# Altium PCB PS__INN3947CQ_V2.PcbDoc
Units mm, origin at the board's own origin, x right, y up, seen from the top; angles counter-clockwise.
Board outline 66 x 77 mm, 6 copper layers (Top Layer, Mid-Layer 1, Mid-Layer 2, Mid-Layer 3, Mid-Layer 4, Bottom Layer), stack 1.551 mm thick; 61 components, 32 nets, 167 pads, 854 vias.
Unrouted connection lines stored in the file: 65.
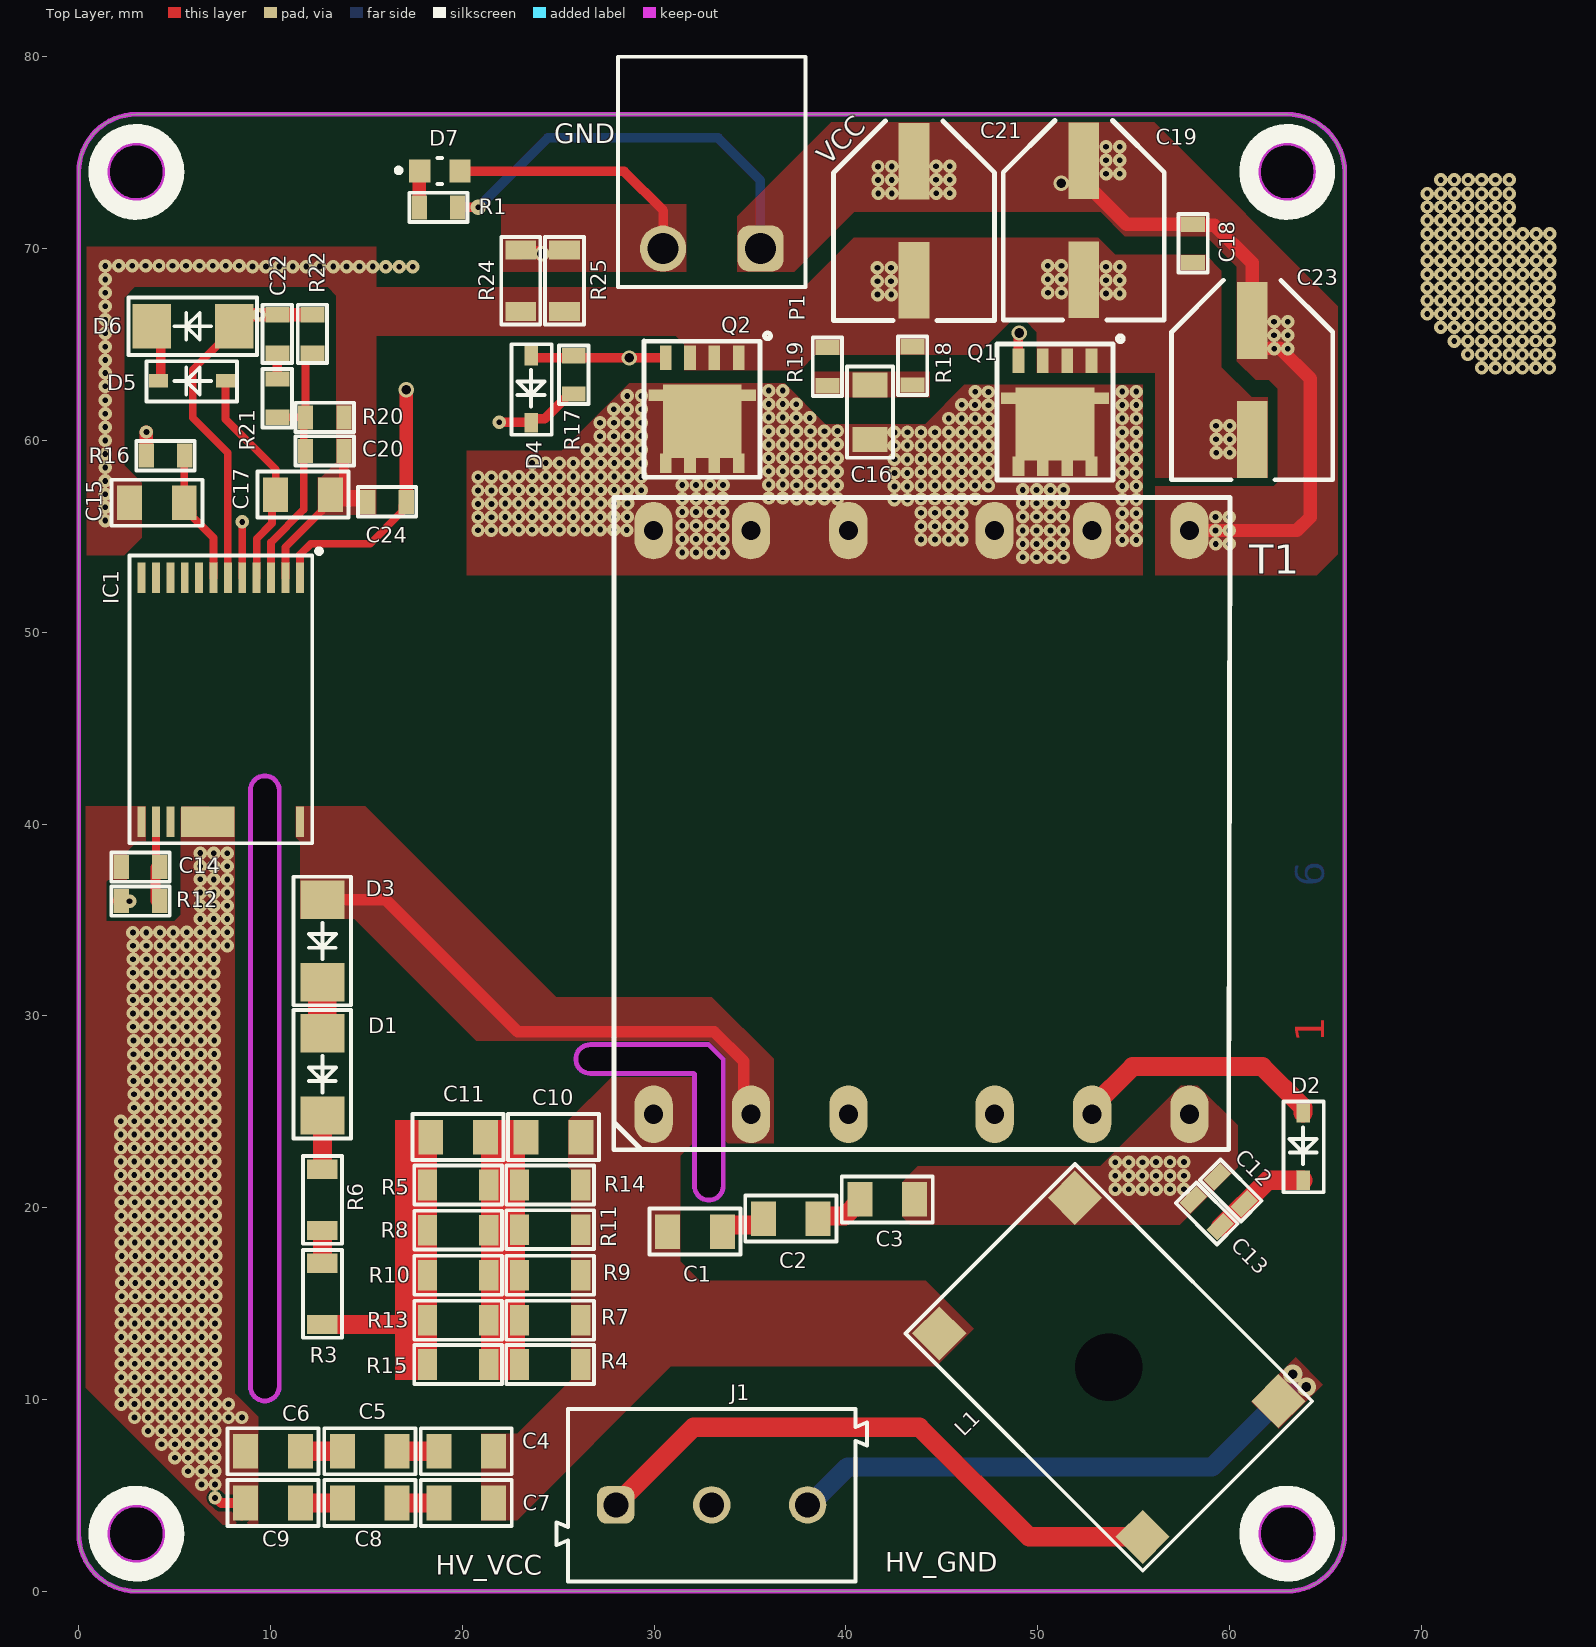
[diagram p0: Top Layer view]
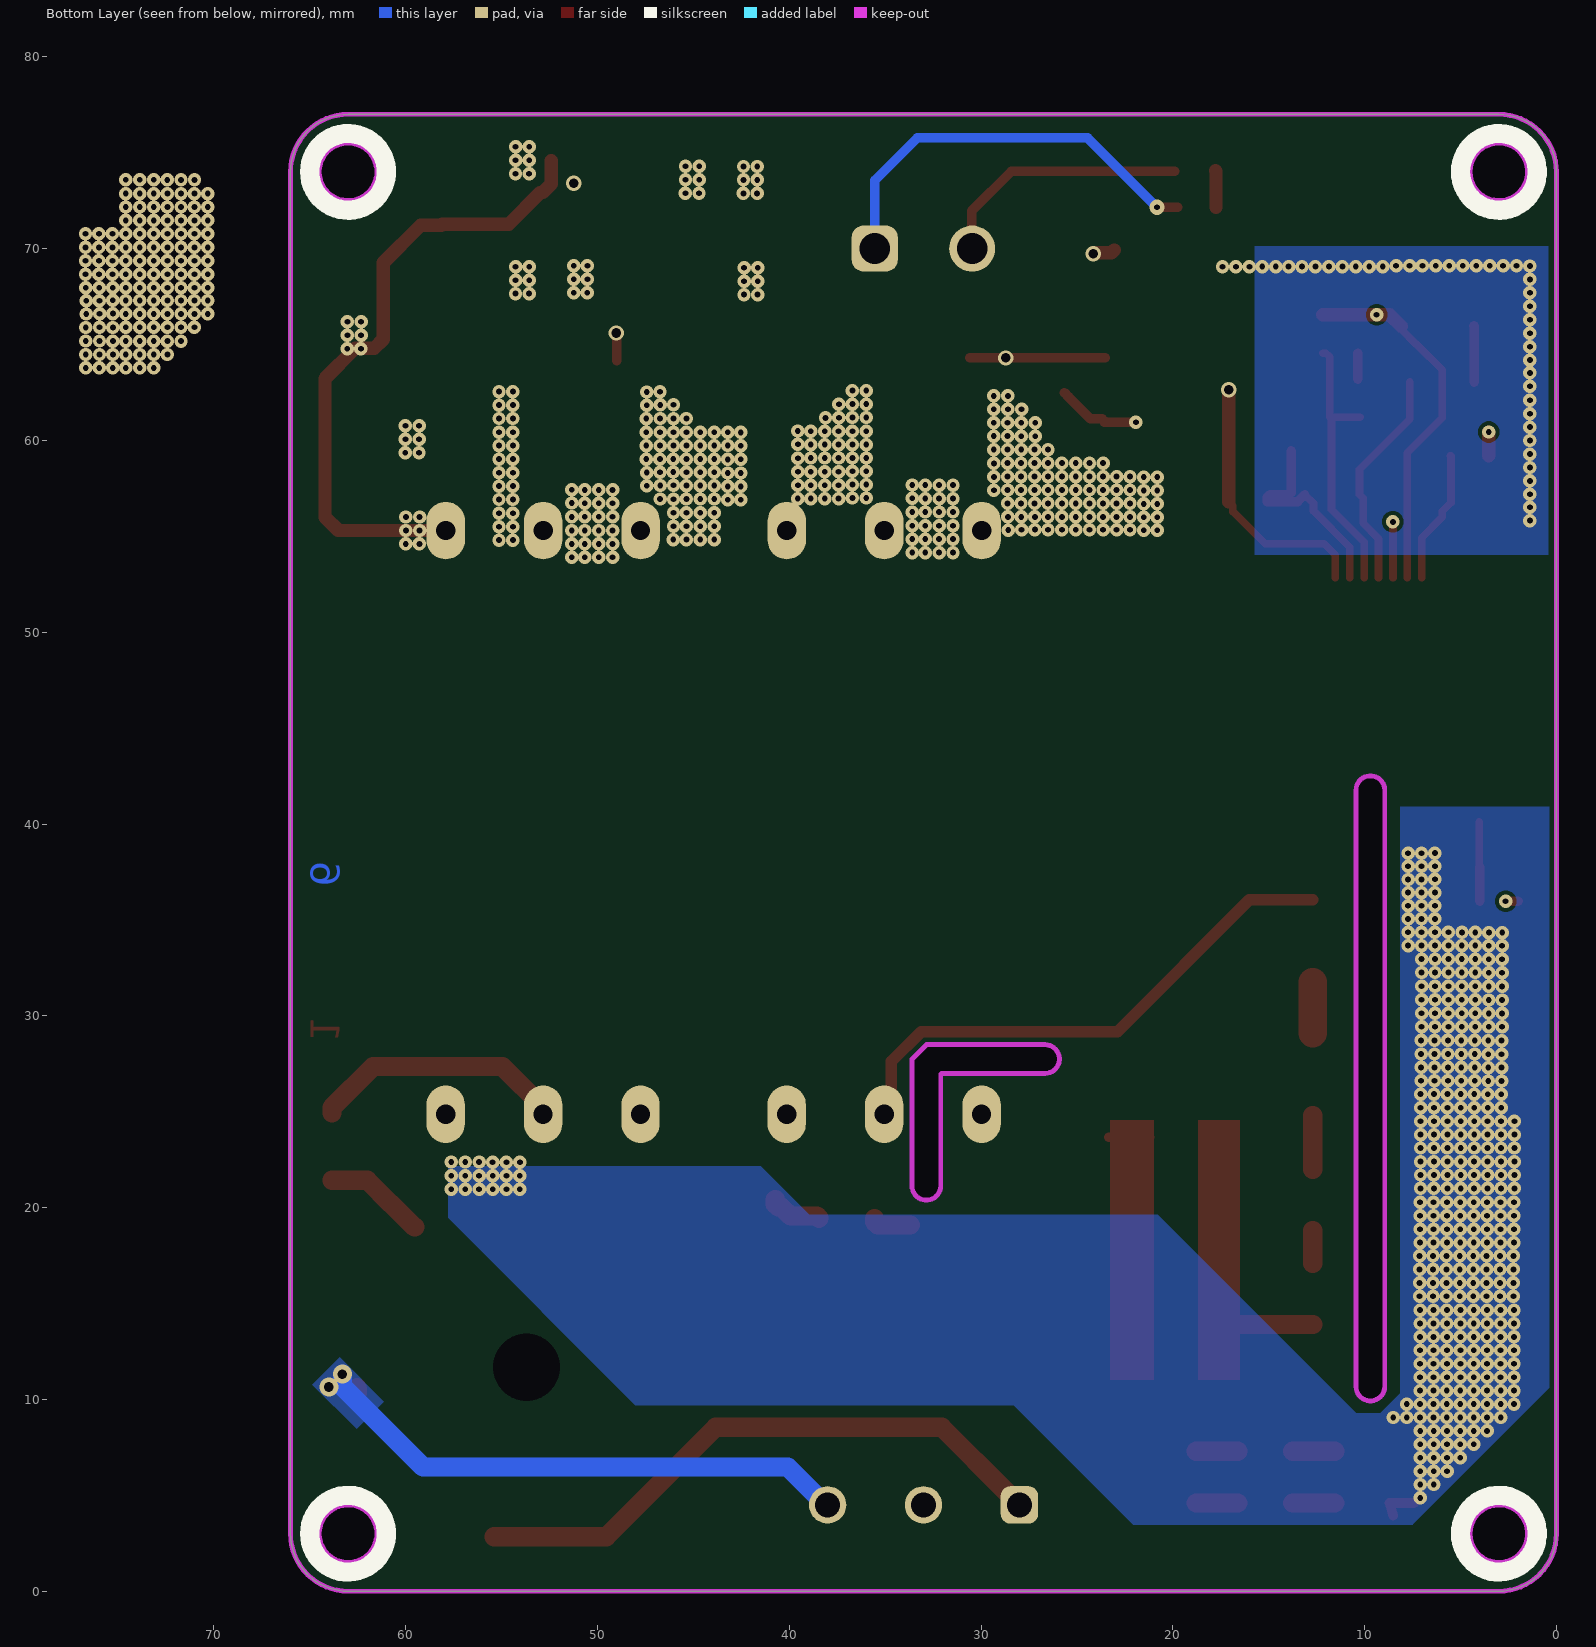
[diagram p1: Bottom Layer view, seen from below]
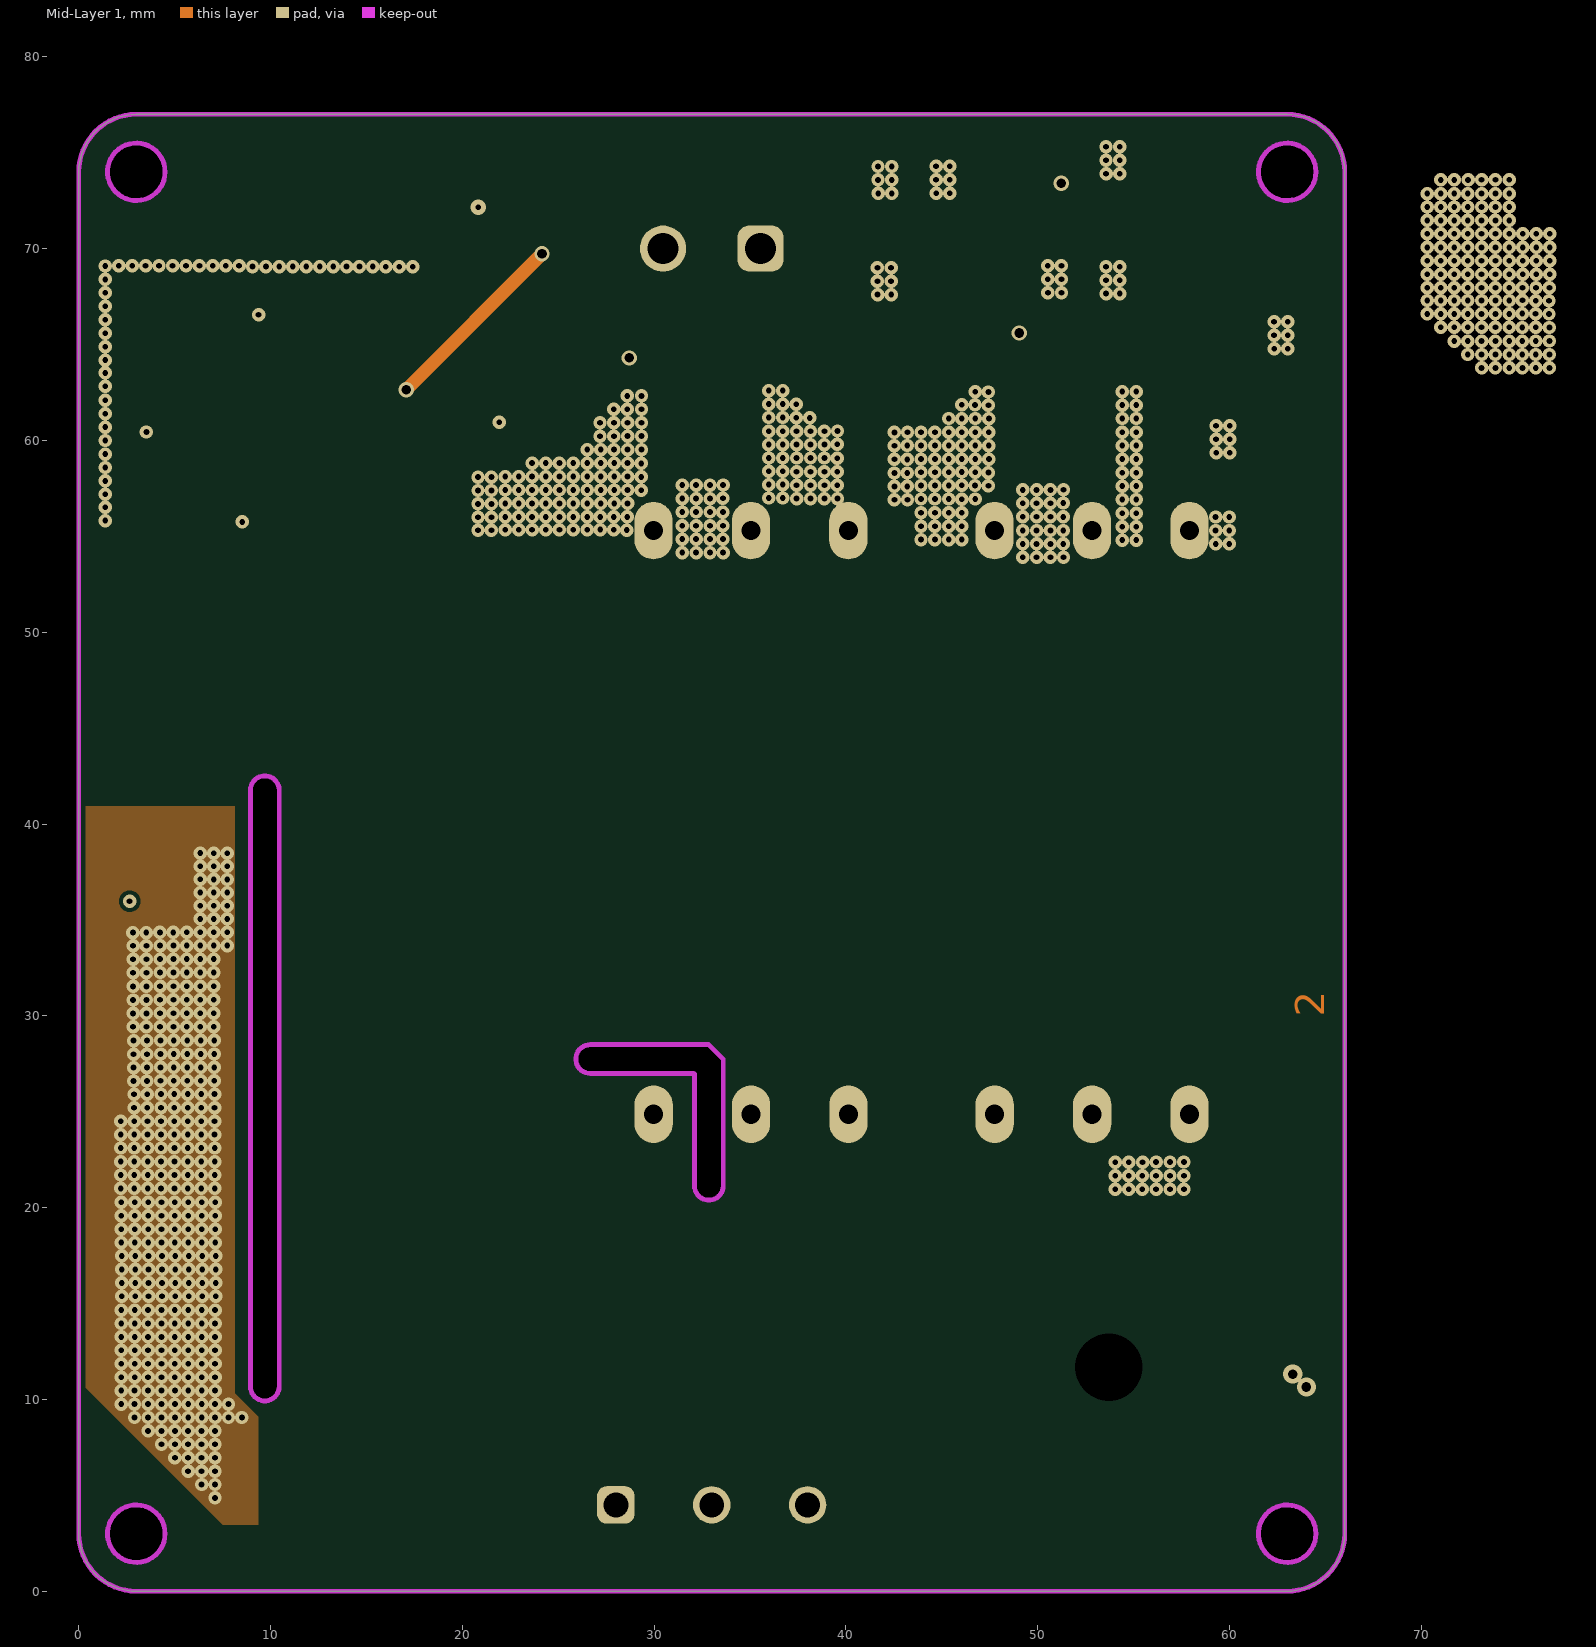
[diagram p2: Mid-Layer 1]
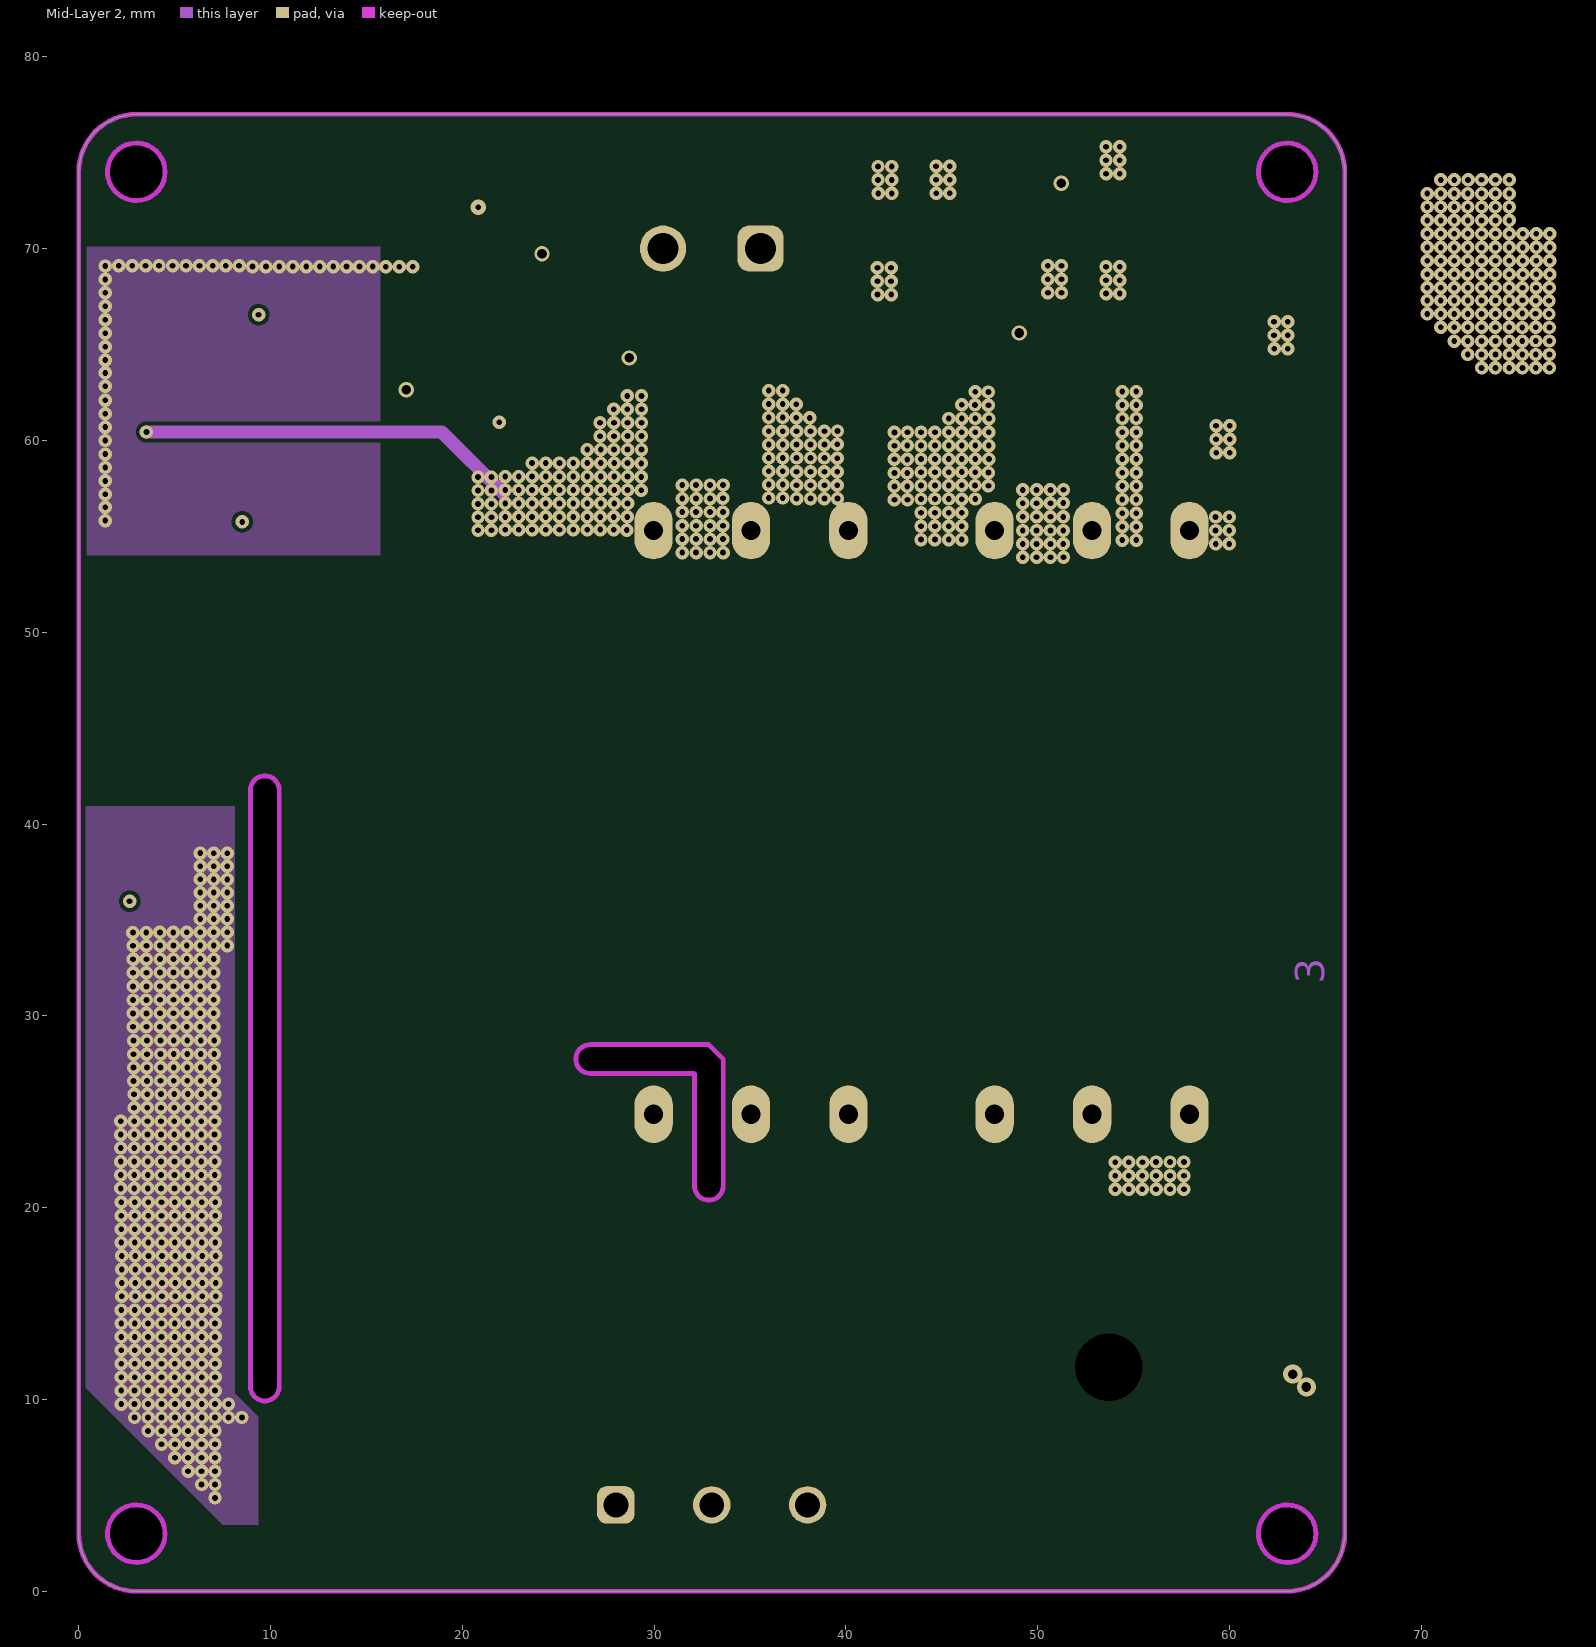
[diagram p3: Mid-Layer 2]
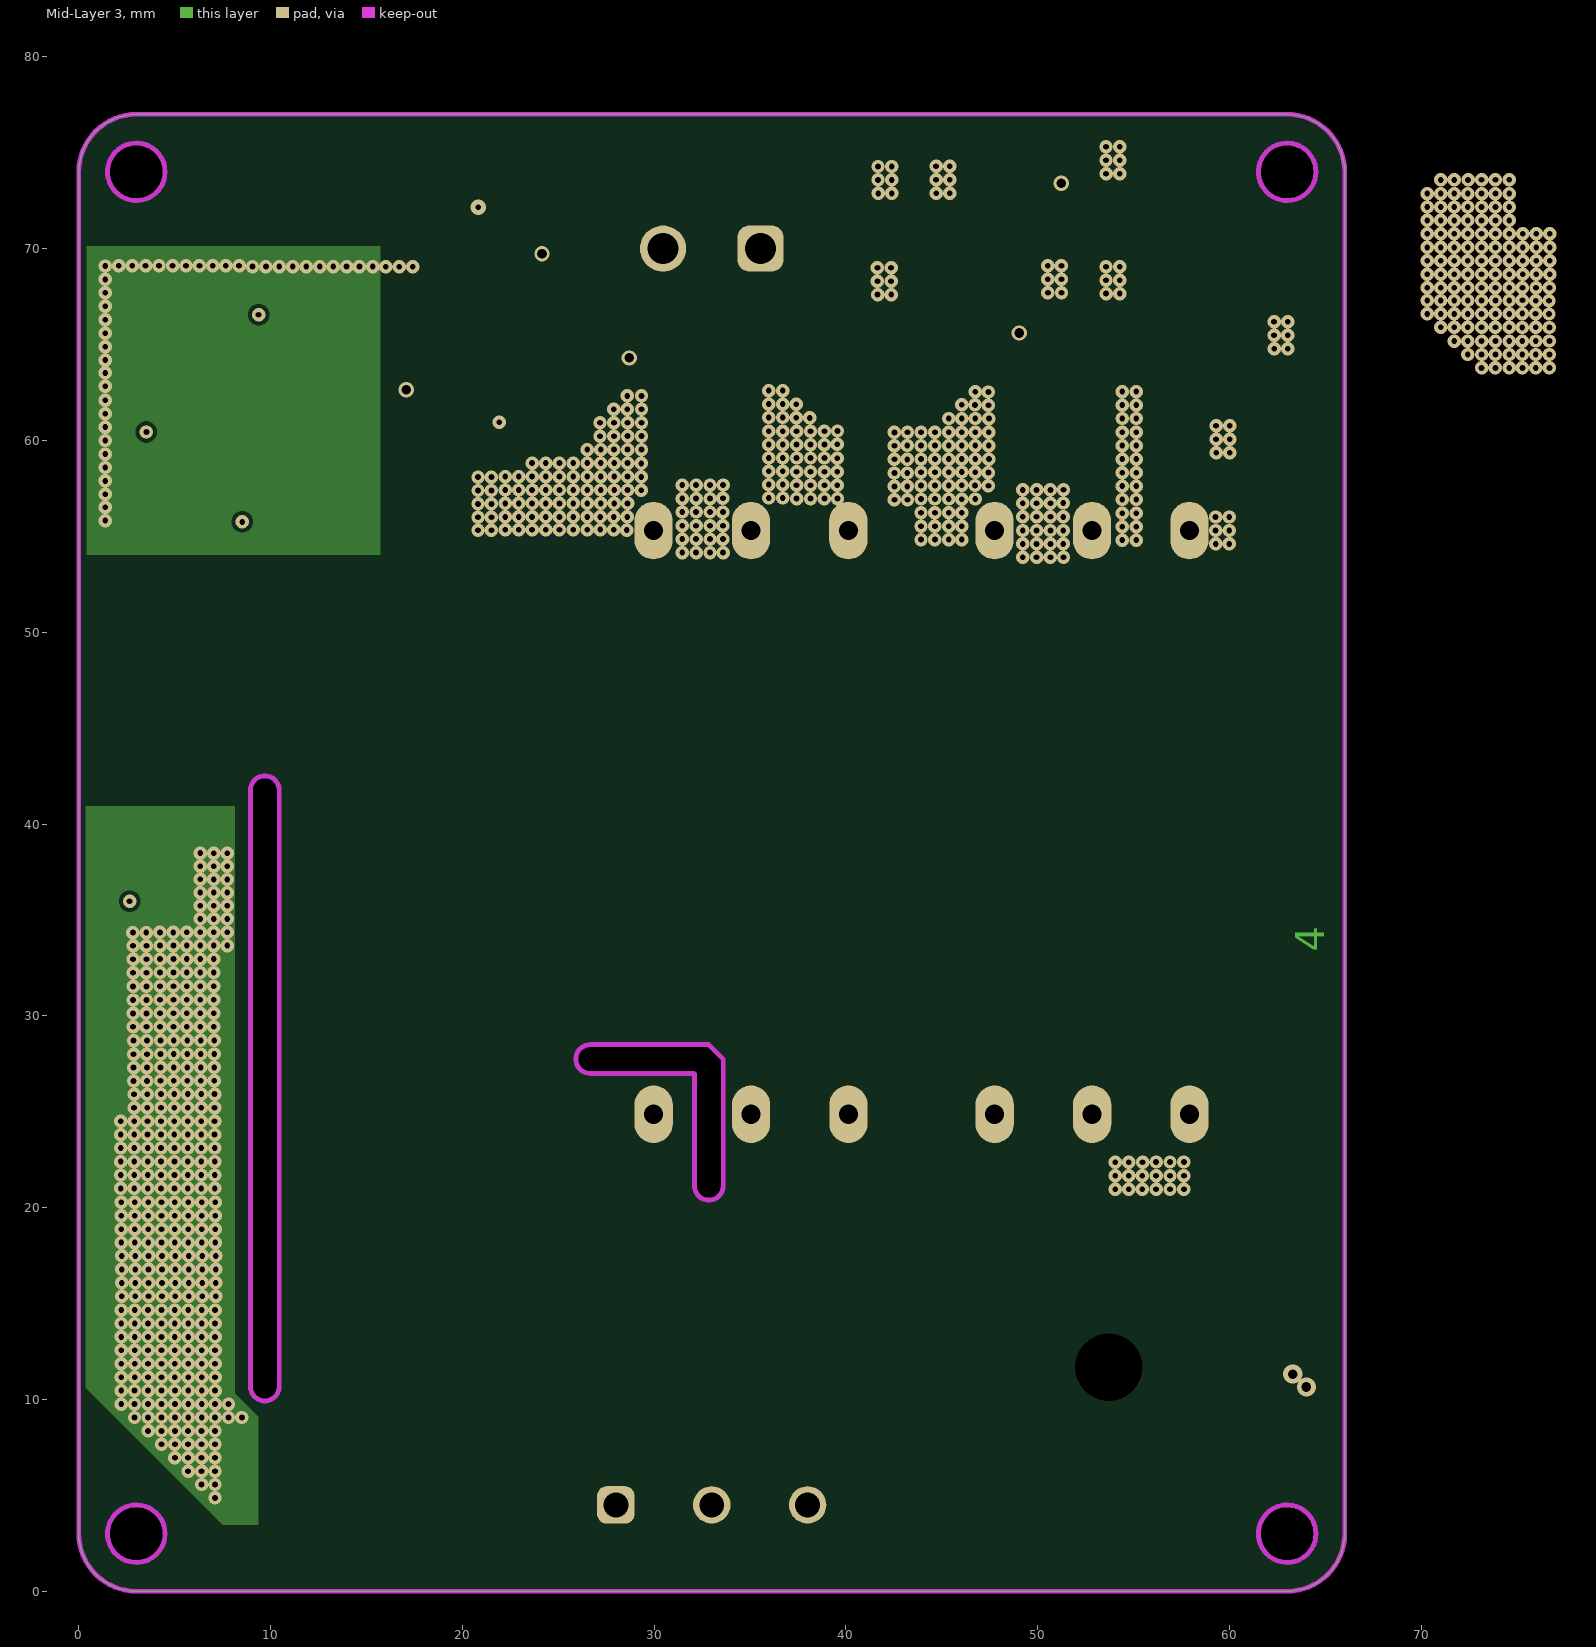
[diagram p4: Mid-Layer 3]
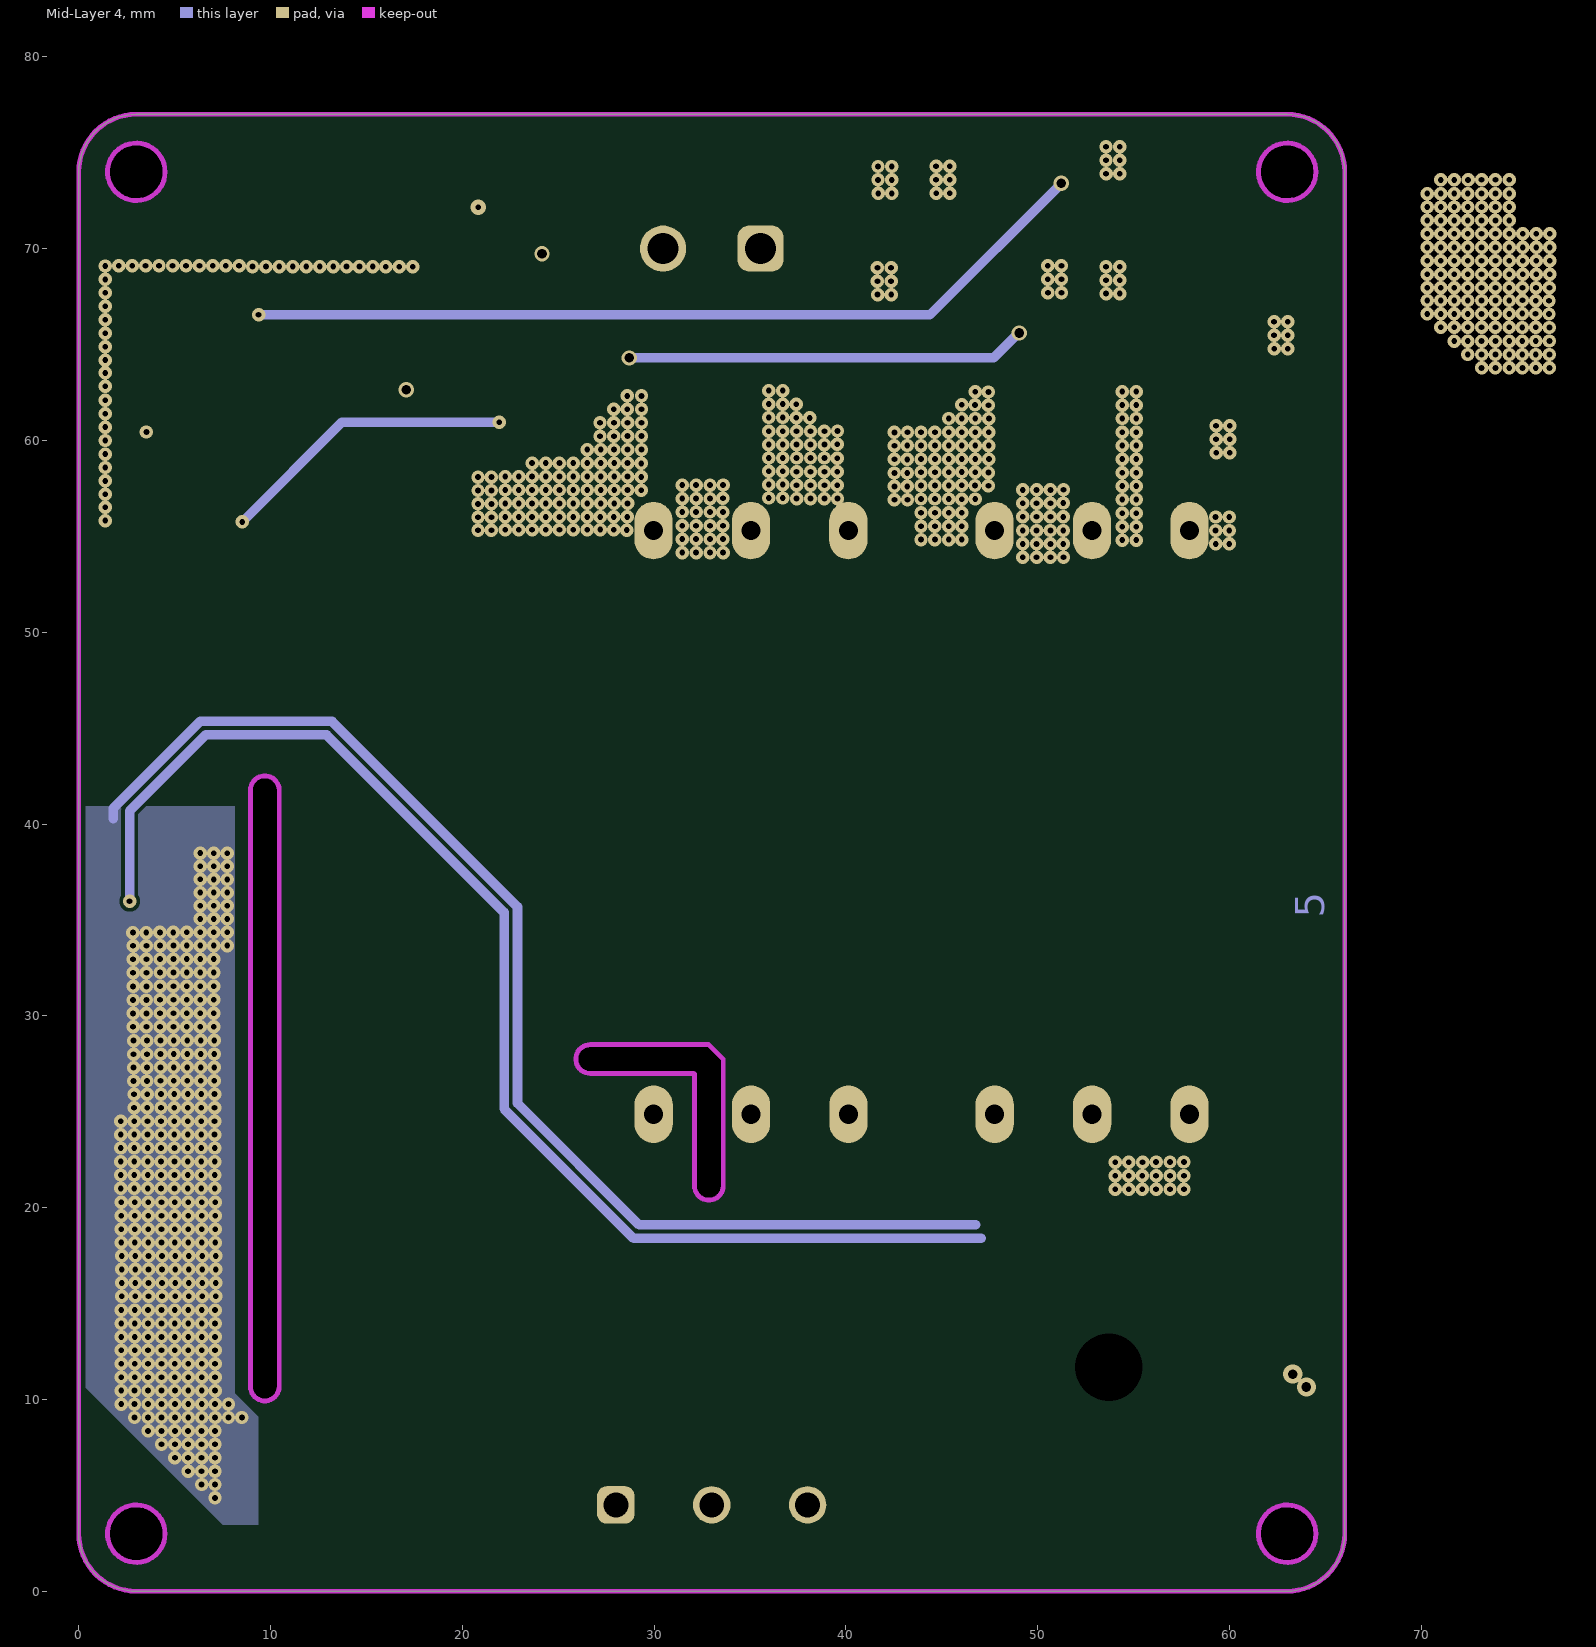
[diagram p5: Mid-Layer 4]
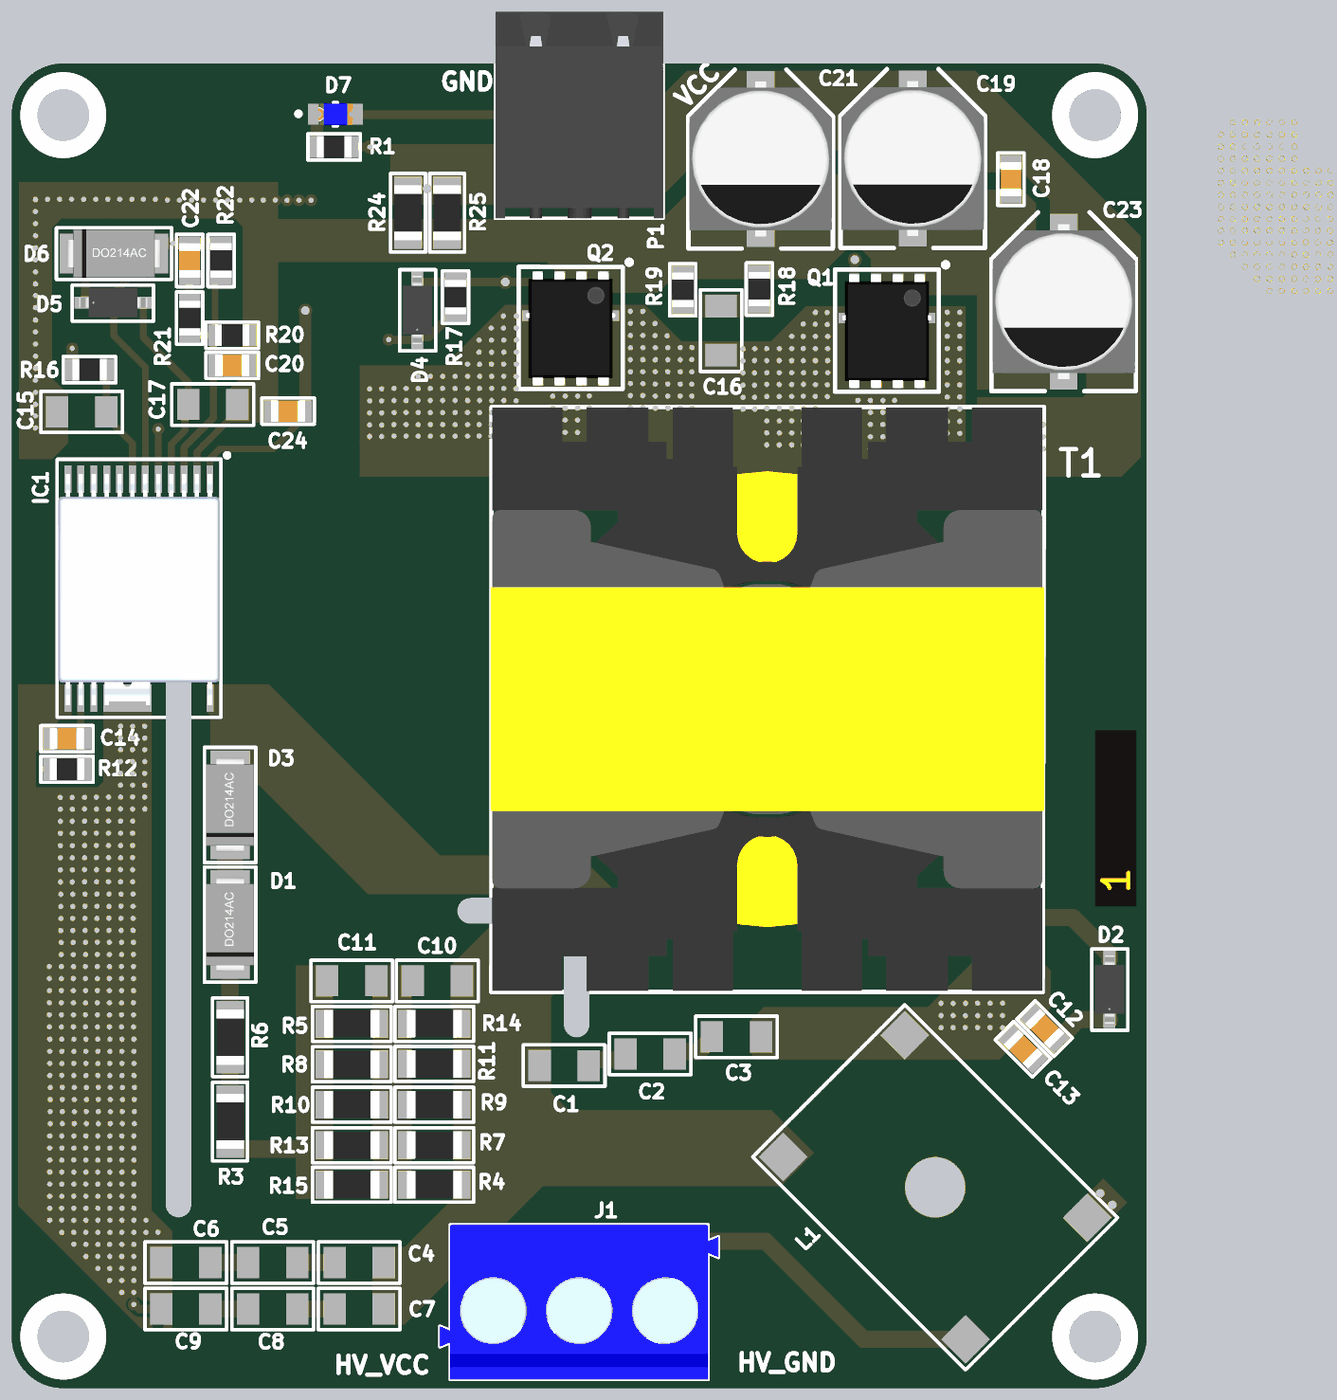
[diagram p6: 3D render of the assembled board from above, using the file's embedded part models]

## Layer stack, top to bottom
Top Solder: solder mask 0.0254, SM-001, Dk 4
Top Layer: signal copper 0.035
Dielectric 1: prepreg 0.0711, PP-006, Dk 4.1
Dielectric 2: prepreg 0.0711, PP-006, Dk 4.1
Mid-Layer 1: signal copper 0.035
Dielectric 3: core 0.4572, Core-035, Dk 4.7
Mid-Layer 2: signal copper 0.035
Dielectric 4: prepreg 0.0711, PP-006, Dk 4.1
Dielectric 5: prepreg 0.0711, PP-006, Dk 4.1
Mid-Layer 3: signal copper 0.035
Dielectric 6: core 0.4572, Core-035, Dk 4.7
Mid-Layer 4: signal copper 0.035
Dielectric 7: prepreg 0.0711, PP-006, Dk 4.1
Dielectric 8: prepreg 0.0711, PP-006, Dk 4.1
Bottom Layer: signal copper 0.035
Bottom Solder: solder mask 0.0254, SM-001, Dk 4

## Board outline
0,3 ccw(c3,3) 3,0 63,0 ccw(c63,3) 66,3 66,74 ccw(c63,74) 63,77 3,77 ccw(c3,74) 0,74
cut-out: 26.664,26.996 cw(c26.664,27.746) 26.664,28.496 26.664,28.5 32.84,28.5 33.6,27.74 33.6,21.139 cw(c32.85,21.139) 32.1,21.139 32.1,26.957 32.057,27
cut-out: 61.5,74 ccw(c63,74) 63,72.5 ccw(c63,74) 64.5,74 ccw(c63,74) 63,75.5 ccw(c63,74)
cut-out: 1.5,74 ccw(c3,74) 3,72.5 ccw(c3,74) 4.5,74 ccw(c3,74) 3,75.5 ccw(c3,74)
cut-out: 1.5,3 ccw(c3,3) 3,1.5 ccw(c3,3) 4.5,3 ccw(c3,3) 3,4.5 ccw(c3,3)
cut-out: 61.5,3 ccw(c63,3) 63,1.5 ccw(c63,3) 64.5,3 ccw(c63,3) 63,4.5 ccw(c63,3)
cut-out: 8.95,10.675 8.95,41.763 cw(c9.7,41.763) 10.45,41.763 10.45,10.675 cw(c9.7,10.675)

## Design rules (kind name [scope] priority, off if disabled: settings)
Clearance Clearance_1 [All vs InNet('GND_1')] p1: gap=0.2 ignorepadtopadclearanceinfootprint=FALSE
Clearance [All vs InNet('GND')] p2: gap=0.2 ignorepadtopadclearanceinfootprint=FALSE except(0.4: Fill-Fill Fill-Poly Fill-Region Fill-Text Fill-Hole Poly-Poly Poly-Region Poly-Text Poly-Hole Region-Region Region-Text Region-Hole)
ComponentClearance [All] p1: gap=-3 collisioncheckmode=3 verticalgap=0.254 showdistances=FALSE
Height [All] p1: minheight=0 maxheight=50 prefheight=33
HoleSize [All] p1: absolutevalues=TRUE maxlimit=6 minlimit=0.01 maxpercent=80.000 minpercent=20.000
HoleToHoleClearance [All] p1: gap=0.1 allowstackedmicrovias=TRUE
MinimumSolderMaskSliver [All] p1: minsoldermaskwidth=0.1
PlaneClearance [All] p1: clearance=0.7
PlaneConnect [All] p1: planeconnectstyle=Direct reliefexpansion=0.5 reliefentries=4 reliefconductorwidth=0.5 reliefairgap=0.15
PolygonConnect VQFN20 [HasFootprint('VQFN20')] p1: connectstyle=Direct reliefconductorwidth=0.254 reliefentries=4 polygonreliefangle="90 Angle" airgapwidth=0.254
PolygonConnect [All] p2: connectstyle=Direct reliefconductorwidth=0.3 reliefentries=4 polygonreliefangle="90 Angle" airgapwidth=0.15
RoutingVias [All] p1: holewidth=0.1 width=0.1 viastyle="Through Hole" minholewidth=0 minwidth=0.3 maxholewidth=2 maxwidth=4
ShortCircuit [All] p1: allowed=TRUE
SilkToSolderMaskClearance [IsPad] p1: minsilkscreentomaskgap=0.1 clearancetoexposedcopper=TRUE
SolderMaskExpansion SolderMaskExpansion_Via [IsVia] p1: expansion=0.102 istentingtop=TRUE
SolderMaskExpansion [All] p2: expansion=0.01 istentingtop=FALSE
UnRoutedNet [All] p1: checkbadconnections=TRUE
Width [All] p1: maxlimit=5 minlimit=0.2 preferedwidth=0.3
20 further rules are at their usual default settings.

## Components (designator, comment, footprint, x,y, rotation, side; value= is the part's Value field where it differs from the comment)
C1 "68nF 500V" CAP-1206 32.125,18.75 r0 top
C2 "68nF 500V" CAP-1206 37.125,19.425 r0 top
C3 "68nF 500V" CAP-1206 42.15,20.425 r0 top locked
C4 "68nF 500V" CAP-1206 20.202,7.3 r180 top
C5 "68nF 500V" CAP-1206 15.177,7.3 r180 top
C6 "68nF 500V" CAP-1206 10.127,7.3 r180 top
C7 "68nF 500V" CAP-1206 20.202,4.6 r180 top
C8 "68nF 500V" CAP-1206 15.177,4.6 r180 top
C9 "68nF 500V" CAP-1206 10.127,4.6 r180 top
C10 "6.8nF 630V" CAP-1206 24.75,23.675 r180 top
C11 "6.8nF 630V" CAP-1206 19.775,23.675 r180 top
C12 "10uF 50v" CAP-0805 60.06,20.9 r315 top
C13 "10uF 50v" CAP-0805 58.81,19.7 r315 top
C14 "4.7uF" CAP-0805 3.216,37.75 r0 top
C15 "330pF 630V" CAP-1206 4.075,56.75 r180 top
C16 "1500pF 630V" CAP-1206 41.251,61.471 r270 top
C17 "2,2uF" CAP-1206 11.69,57.175 r0 top
C18 "470nF 100V" CAP-0805 58.1,70.275 r90 top
C19 "470uF 25V" CAPPOL_SMD_SIZE_E 52.395,71.475 r270 top locked
C20 "330pF" CAP-0805 12.825,59.45 r0 top
C21 "470uF 25V" CAPPOL_SMD_SIZE_E 43.55,71.45 r270 top locked
C22 "10nF" CAP-0805 10.349,65.55 r90 top
C23 "470uF 25V" CAPPOL_SMD_SIZE_E 61.175,63.15 r270 top
C24 "330pF 16V" CAP-0805 16.075,56.8 r180 top
D1 "NRVUS2MA" "DO-214AC, SMA" 12.7,26.95 r90 top
D2 "BAS21GWX" SOD-123 63.833,23.175 r90 top
D3 "NRVUS2MA" "DO-214AC, SMA" 12.7,33.9 r90 top
D4 "4148" SOD-123 23.582,62.665 r90 top
D5 "PDZ15BGWJ" SOD-123 5.9,63.1 r0 top
D6 "SS14" "DO-214AC, SMA" 5.95,65.95 r0 top
D7 "151031YS06000" LED_BLUE 18.825,74.05 r0 top
IC1 "INN3947CQ" INN3947CQ 7.4,46.425 r90 top locked
J1 "691101710003" 691101710003 33,5 r0 top locked
L1 "L_13x13mm" L_13x13mm 53.7,11.675 r135 top locked
P1 "691701530002B" 691701530002B 33,74 r180 top locked
Q1 "DMT15H017LPS" DMT15H017LPS_SWP 50.895,61.45 r180 top locked
Q2 "DMT15H017LPS" DMT15H017LPS_SWP 32.5,61.599 r180 top locked
R1 "10K" RES-0805 18.75,72.15 r0 top
R3 "7.5" RES-1206 12.7,15.5 r270 top
R4 "390K" RES-1206 24.575,11.825 r180 top
R5 "390K" RES-1206 19.775,21.175 r180 top
R6 "7.5" RES-1206 12.7,20.4 r270 top
R7 "390K" RES-1206 24.575,14.125 r180 top
R8 "390K" RES-1206 19.775,18.825 r180 top
R9 "390K" RES-1206 24.575,16.475 r180 top
R10 "390K" RES-1206 19.775,16.475 r180 top
R11 "390K" RES-1206 24.575,18.85 r180 top
R12 "8.2K" RES-0805 3.216,35.975 r180 top
R13 "390K" RES-1206 19.775,14.125 r180 top
R14 "390K" RES-1206 24.575,21.175 r180 top
R15 "390K" RES-1206 19.775,11.825 r180 top
R16 "100" RES-0805 4.524,59.2 r180 top
R17 "4,7" RES-0805 25.807,63.415 r90 top
R18 "12" RES-0805 43.475,63.89 r270 top
R19 "12" RES-0805 39.025,63.846 r270 top
R20 "9.1K" RES-0805 12.825,61.2 r0 top
R21 "10K" RES-0805 10.35,62.2 r90 top
R22 "100K" RES-0805 12.175,65.55 r90 top
R24 "0.027" RES-1206 23.045,68.325 r270 top
R25 "0.027" RES-1206 25.323,68.325 r270 top
T1 "TRANS_PQ3220" TRANS_PQ3220 43.935,40.05 r90 top locked

## Footprints (in the part's own frame and the unit in brackets; to place one, negate y for a bottom-side part, rotate by r counter-clockwise, add the part's x,y. Pads: shape width x height; smd on the part's side, far side on the other; paste and mask are expansions set on the pad)
691101710003 [mm] "5,00mm - modular - blue - Horizontal entry with pressure clamp - 12,6mm height - 03p"
  rrect50% 1.95x1.95 hole 1.3: 1(-5,-0.5)
  round 1.95 hole 1.3: 2(0,-0.5) 3(5,-0.5)
  silkscreen extent -8.1,-4.5 8.1,4.5, body extent -8.1,-4.5 8.1,4.5, height 12.65
691701530002B [mm] "THR - 5,08mm - PCB Horizontal Open - 02p"
  rrect50% 2.4x2.4 hole 1.6: 1(-2.54,4)
  round 2.4 hole 1.6: 2(2.54,4)
  silkscreen extent -4.88,-6 4.88,6, body extent -4.9,-6 4.86,6, height 8.6
CAP-0805 [mm]
  rect 0.8x1.25 smd mask+0.015: 1(-1,0) 2(1,0)
  silkscreen extent -1.52,-0.76 1.52,0.76, body extent -1,-0.62 1,0.63, height 0.8
CAP-1206 [mm]
  rect 1.3x1.8 smd: 1(-1.425,0) 2(1.425,0)
  silkscreen extent -2.37,-1.2 2.37,1.2, body extent -1.68,-0.87 1.67,0.87, height 0.95
CAPPOL_SMD_SIZE_E [mm]
  rect 4x1.6 smd: 1(-3.1,0) 2(3.1,0)
  silkscreen extent -5.2,-4.2 5.2,4.2, body extent -4.5,-4.15 4.5,4.15, height 6.2
DMT15H017LPS_SWP [mm]
  rect 0.61x1.27 smd: 1(1.905,-2.7) 3(-1.905,-2.7) 3(-0.635,-2.7) 3(0.635,-2.7)
  rect 0.61x1.02 smd: 2(-1.908,2.8) 2(-0.638,2.8) 2(0.632,2.8) 2(1.902,2.8)
  rect 4.1x3.81 smd: 2(0,0.6)
  rect 5.61x0.6 smd: 2(0,-0.75)
  silkscreen extent -3.56,-4 3.03,3.52, body extent -2.6,-3.3 2.6,3.31, height 1
"DO-214AC, SMA" [mm]
  rect 2x2.3 smd: 1(-2.15,0) 2(2.15,0)
  silkscreen extent -3.35,-1.5 3.35,1.5, body extent -2.74,-1.4 2.74,1.4, height 2.24
INN3947CQ [mm]
  rect 1.6x0.41 smd: 1(6.41,-4.125) 2(6.41,-3.375) 3(6.41,-2.625) 4(6.41,-1.875) 5(6.41,-1.125) 6(6.41,-0.375) 7(6.41,0.375) 8(6.41,1.125) 9(6.41,1.875) 10(6.41,2.625) 11(6.41,3.375) 12(6.41,4.125) 13(-6.31,4.125) 14(-6.31,3.375) 15(-6.31,2.625) 24(-6.31,-4.125)
  rect 1.6x2.81 smd: 16(-6.31,0.675)
  silkscreen extent -7.42,-5.25 7.92,4.75, body extent -6.72,-4.7 6.72,4.7, height 1.6
L_13x13mm [mm]
  round 2 hole 3.5: 0(0,0)
  rect 2x2 smd: 1(-7.5,5) 2(7.5,5) 3(-7.5,-5) 4(7.5,-5)
  silkscreen extent -8.75,-6.25 8.75,6.25, body extent -12.6,-12.56 12.6,12.56, height 7.5
LED_BLUE [mm]
  rect 1.1x1.2 smd paste+0 mask+0: 1(-1.05,0) 2(1.05,0)
  silkscreen extent -2.27,-0.67 0.13,0.67, body extent -1,-0.63 1,0.63, height 0.8
RES-0805 [mm]
  rect 0.8x1.25 smd mask+0.015: 1(-1,0) 2(1,0)
  silkscreen extent -1.52,-0.76 1.52,0.76, body extent -1,-0.62 1,0.63, height 0.6
RES-1206 [mm]
  rect 1x1.6 smd: 1(-1.6,0) 2(1.6,0)
  silkscreen extent -2.29,-1.02 2.29,1.02, body extent -1.6,-0.8 1.6,0.8, height 0.6
SOD-123 [mm]
  rect 1x0.7 smd: 1(-1.75,0) 2(1.75,0)
  silkscreen extent -2.37,-1.08 2.35,1.02, body extent -1.98,-0.85 1.98,0.85, height 1.45
TRANS_PQ3220 [mm]
  oval 3x2 hole 1: 1(-15.183,13.966) 2(-15.183,8.886) 3(-15.183,3.806) 4(-15.183,-3.814) 5(-15.183,-8.894) 6(-15.183,-13.974) 7(15.25,-13.97) 8(15.25,-8.89) 9(15.25,-3.81) 10(15.25,3.81) 11(15.25,8.89) 12(15.25,13.97)
  silkscreen extent -17.03,-16.09 16.98,16.04, body extent -16.96,-16.1 16.96,16.1, height 24.1

## Part data
C1 C2 C3 C4 C5 C6 C7 C8 C9 C10 C11 C12 C13 C14 C15 C16 C17 C18 C20 C22 C24: library part CAP-NON-POLAR
C19 C21 C23: library part CAP-POLAR
D1 D2 D3 D4 D5 D6: library part DIODE
D7: library part LED, "WURTH ELEKTRONIK - 151031YS06000 - LED, Yellow, Through Hole, T-1 (3mm), 30 mA, 2 V, 590 nm", Manufacturer_Name="Wurth Elektronik", Mouser Part Number=710-151031YS06000, Datasheet Link=https://katalog.we-online.de/led/datasheet/151031YS06000.pdf, Geometry.Height=5.5mm, Manufacturer_Part_Number=151031YS06000, Mouser Price/Stock=https://www.mouser.co.uk/ProductDetail/Wurth-Elektronik/151031YS06000?qs=LlUlMxKIyB3xSYYW%252BcuBiQ%3D%3D
J1: "WR-TBL Series 101 Horizontal Entry Modular, THT, pitch 5mm, 3p", Manufacturer="Wurth Elektronik", Operating Temperature Max=105°C, Operating Temperature Min=-40°C, Rated Current=16A, Working Voltage=250V, Application="Pressure Clamp", Category="Terminal Blocks", ComponentLink1Description="Website Link", ComponentLink1URL=https://www.we-online.com/redexpert/article/691101710003?ad, ComponentLink2Description="Datasheet Link", ComponentLink2URL=https://www.we-online.com/redexpert/spec/691101710003?ad, Manufacturer Part Number=691101710003, Match Code=WR-TBL, Modularity=Yes, Mount="Through Hole", Number of Pins=3, Number of Rows=1, Orientation=Horizontal, Packaging=Box, Pitch=5mm
P1: "WR-TBL Series 7015B Open Horizontal PCB Header, SMT, pitch 5.08mm, 2p", Manufacturer="Wurth Elektronik", Operating Temperature Max=105°C, Operating Temperature Min=-40°C, Rated Current=10A, Working Voltage=300V, Application=Pluggable, Category="Terminal Blocks", ComponentLink1Description="Website Link", ComponentLink1URL=https://www.we-online.com/redexpert/article/691701530002B?ad, ComponentLink2Description="Datasheet Link", ComponentLink2URL=https://www.we-online.com/redexpert/spec/691701530002B?ad, Manufacturer Part Number=691701530002B, Match Code=WR-TBL, Modularity=No, Mount="Surface Mount", Number of Pins=2, Number of Rows=1, Orientation=Horizontal, Packaging=Box, Pitch=5.08mm
R1 R3 R4 R5 R6 R7 R8 R9 R10 R11 R12 R13 R14 R15 R16 R17 R18 R19 R20 R21 R22 R24 R25: library part RES-CONST

## Via types
v1: diameter 0.7, hole 0.3, Top Layer to Bottom Layer, tented both sides, 846 vias
v2: diameter 0.8, hole 0.5, Top Layer to Bottom Layer, tented both sides, 5 vias
v3: diameter 1, hole 0.5, Top Layer to Bottom Layer, tented both sides, 2 vias
v4: diameter 0.8, hole 0.3, Top Layer to Bottom Layer, tented both sides, 1 vias

## Nets (pads, with @x,y where several pads share a name; then routed paths per layer and width w, separated by ;. In a path a pad name is that pad's centre, name@x,y a point inside that pad or via, vN(x,y) a via of type N, cw(c..) or ccw(c..) an arc to the next point about the centre after c; other vN are vias at no path point)
GND: C3.2 C6.2 C9.2 C12.1 C13.1 C14.1 IC1.13 IC1.16 L1.4 T1.6 | length 66.7
  Top Layer w0.5: v1(7.102,4.864) 7.156,4.864 7.419,4.6 C9.2 C9.2@8.508,3.95
  Mid-Layer 4 w0.5: 1.8,40.275 1.8,40.825 6.325,45.35 13.209,45.35 22.875,35.684 22.875,25.44 29.215,19.1 46.767,19.1
  other v1: 6.402,5.564 7.102,5.564 5.701,6.258 6.402,6.258 7.102,6.258 5.014,6.958 5.701,6.958 6.402,6.958 7.102,6.958 4.314,7.658 5.014,7.658 5.701,7.658 6.402,7.658 7.102,7.658 3.614,8.358 4.314,8.358 5.014,8.358 5.701,8.358 6.402,8.358 7.102,8.358 2.908,9.059 3.614,9.059 4.314,9.059 5.014,9.059 5.714,9.059 6.408,9.059 7.108,9.059 7.808,9.059 8.508,9.059 2.214,9.759 2.908,9.759 3.614,9.759 4.314,9.759 5.014,9.759 5.714,9.759 6.408,9.759 7.108,9.759 7.808,9.759 2.213,10.46 2.908,10.46 3.614,10.46 4.314,10.46 5.014,10.46 5.714,10.46 6.408,10.46 7.108,10.46 2.214,11.159 2.914,11.159 3.614,11.159 4.314,11.159 5.008,11.159 5.708,11.159 6.408,11.159 7.108,11.159 2.214,11.859 2.914,11.859 3.614,11.859 4.314,11.859 5.008,11.859 5.708,11.859 6.408,11.859 7.108,11.859 2.214,12.56 2.914,12.56 3.614,12.56 4.314,12.56 5.008,12.56 5.708,12.56 6.408,12.56 7.108,12.56 2.214,13.259 2.914,13.259 3.614,13.259 4.314,13.259 5.008,13.259 5.708,13.259 6.408,13.259 7.108,13.259 2.214,13.959 2.914,13.959 3.614,13.959 4.314,13.959 5.008,13.959 5.708,13.959 6.408,13.959 7.108,13.959 2.214,14.66 2.914,14.66 3.614,14.66 4.314,14.66 5.008,14.66 5.708,14.66 6.408,14.66 7.108,14.66 2.242,15.375 2.942,15.375 3.642,15.375 4.342,15.375 5.036,15.375 5.736,15.375 6.436,15.375 7.136,15.375 2.242,16.075 2.942,16.075 3.642,16.075 4.342,16.075 5.036,16.075 5.736,16.075 6.436,16.075 7.136,16.075 2.242,16.776 2.942,16.776 3.642,16.776 4.342,16.776 5.036,16.776 5.736,16.776 6.436,16.776 7.136,16.776 2.242,17.483 2.942,17.483 3.642,17.483 4.342,17.483 5.036,17.483 5.736,17.483 6.436,17.483 7.136,17.483 2.217,18.175 2.917,18.175 3.617,18.175 4.317,18.175 5.011,18.175 5.711,18.175 6.411,18.175 7.111,18.175 2.217,18.875 2.917,18.875 3.617,18.875 4.317,18.875 5.011,18.875 5.711,18.875 6.411,18.875 7.111,18.875 2.217,19.576 2.917,19.576 3.617,19.576 4.317,19.576 5.011,19.576 5.711,19.576 6.411,19.576 7.111,19.576 2.217,20.283 2.917,20.283 3.617,20.283 4.317,20.283 5.011,20.283 5.711,20.283 6.411,20.283 7.111,20.283 54.042,20.959 54.743,20.959 55.45,20.959 56.167,20.959 56.892,20.959 57.617,20.959 2.192,21 2.892,21 3.592,21 4.292,21 4.986,21 5.686,21 6.386,21 7.086,21 54.042,21.659 54.743,21.659 55.45,21.659 56.167,21.659 56.892,21.659 57.617,21.659 2.192,21.7 2.892,21.7 3.592,21.7 4.292,21.7 4.986,21.7 5.686,21.7 6.386,21.7 7.086,21.7 54.039,22.369 54.743,22.369 55.464,22.369 56.167,22.379 56.892,22.379 57.617,22.379 2.192,22.401 2.892,22.401 3.592,22.401 4.292,22.401 4.986,22.401 5.686,22.401 6.386,22.401 7.086,22.401 2.192,23.108 2.892,23.108 3.592,23.108 4.292,23.108 4.986,23.108 5.686,23.108 6.386,23.108 7.086,23.108 2.189,23.809 2.889,23.809 3.589,23.809 4.289,23.809 4.983,23.809 5.683,23.809 6.383,23.809 7.083,23.809 2.189,24.509 2.889,24.509 3.589,24.509 4.289,24.509 4.983,24.509 5.683,24.509 6.383,24.509 7.083,24.509 2.883,25.201 3.577,25.201 4.289,25.21 4.983,25.21 5.683,25.21 6.383,25.21 7.083,25.21 2.883,25.908 3.577,25.908 4.289,25.917 4.983,25.917 5.683,25.917 6.383,25.917 7.083,25.917 2.858,26.6 3.552,26.6 4.264,26.609 4.958,26.609 5.658,26.609 6.358,26.609 7.058,26.609 2.858,27.3 3.552,27.3 4.264,27.309 4.958,27.309 5.658,27.309 6.358,27.309 7.058,27.309 2.858,28.001 3.552,28.001 4.264,28.01 4.958,28.01 5.658,28.01 6.358,28.01 7.058,28.01 2.858,28.708 3.552,28.708 4.264,28.717 4.958,28.717 5.658,28.717 6.358,28.717 7.058,28.717 2.833,29.425 3.527,29.425 4.239,29.434 4.933,29.434 5.633,29.434 6.333,29.434 7.033,29.434 2.833,30.125 3.527,30.125 4.239,30.134 4.933,30.134 5.633,30.134 6.333,30.134 7.033,30.134 2.833,30.826 3.527,30.826 4.239,30.835 4.933,30.835 5.633,30.835 6.333,30.835 7.033,30.835 2.833,31.533 3.527,31.533 4.239,31.542 4.933,31.542 5.633,31.542 6.333,31.542 7.033,31.542 2.833,32.25 3.527,32.25 4.239,32.259 4.933,32.259 5.633,32.259 6.333,32.259 7.033,32.259 2.833,32.95 3.527,32.95 4.239,32.959 4.933,32.959 5.633,32.959 6.333,32.959 7.033,32.959 2.833,33.651 3.527,33.651 4.239,33.66 4.933,33.66 5.633,33.66 6.333,33.66 7.033,33.66 7.736,33.66 2.825,34.337 3.519,34.337 4.231,34.346 4.925,34.346 5.633,34.36 6.333,34.36 7.033,34.36 7.736,34.36 6.333,35.05 7.033,35.05 7.736,35.05 7.033,35.737 7.736,35.733 6.333,35.741 6.333,36.425 7.033,36.425 7.736,36.425 7.033,37.112 7.736,37.108 6.333,37.116 6.333,37.791 7.033,37.791 7.736,37.791 6.333,38.482 7.033,38.478 7.736,38.474
GND_1: C15.2 C17.2 C18.1 C19.2 C20.2 C21.2 C23.2 C24.2 IC1.2 Q1.3 Q2.3 R18.1 R19.1 R20.2 R24.2 R25.2 | length 11.2
  Top Layer w0.4: IC1.2 10.775,54.432 12.665,56.322 12.665,56.725 C17.2
  Top Layer w0.5: C17.2 13.49,56.8 C24.2 15.075,57.025 14.925,57.175 14.7,57.175 13.925,57.175 13.825,57.275 C20.2
  other v1: 1.384,55.817 1.384,56.517 1.384,57.186 1.384,57.886 1.384,58.586 1.384,59.286 59.301,59.361 60.011,59.361 1.384,59.992 59.295,60.061 60.008,60.061 1.384,60.692 59.295,60.764 60.008,60.764 1.384,61.392 1.384,62.092 1.384,62.817 1.384,63.517 1.384,64.186 1.384,64.886 1.384,65.586 1.384,66.286 1.384,66.992 41.646,67.602 42.356,67.602 53.561,67.655 54.271,67.655 1.384,67.692 50.526,67.702 51.236,67.702 41.64,68.302 42.353,68.302 53.554,68.355 54.267,68.355 1.384,68.392 50.52,68.402 51.233,68.402 41.64,69.005 42.353,69.005 9.058,69.059 9.758,69.059 10.458,69.059 11.158,69.059 11.864,69.059 12.564,69.059 13.264,69.059 13.964,69.059 14.633,69.059 15.333,69.059 16.008,69.051 16.708,69.051 17.408,69.051 53.554,69.057 54.267,69.057 1.384,69.092 2.083,69.109 2.783,69.109 3.483,69.109 4.183,69.109 4.889,69.109 5.589,69.109 6.289,69.109 6.989,69.109 7.658,69.109 8.358,69.109 50.52,69.105 51.233,69.105
NetC1_1: C1.1 C4.1 C7.1 C10.1 L1.2 R4.1 R7.1 R9.1 R11.1 R14.1 T1.1
NetC1_2: C1.2 C2.1 | length 2.1
  Top Layer w1: C1.2@33.675,19.1 35.4,19.1 35.55,19.25 C2.1@35.55,19.425
NetC2_2: C2.2 C3.1 | length 2.9
  Top Layer w1: C2.2@38.453,19.425 38.453,19.462 38.55,19.559 39.937,19.559 40.403,20.025 40.575,20.025 40.725,20.175 C3.1
NetC4_2: C4.2 C5.1 | length 2.2
  Top Layer w1: C5.1 C4.2
NetC5_2: C5.2 C6.1 | length 2.2
  Top Layer w1: C6.1 C5.2
NetC7_2: C7.2 C8.1 | length 2.2
  Top Layer w1: C8.1 C7.2
NetC8_2: C8.2 C9.1 | length 2.2
  Top Layer w1: C9.1 C8.2
NetC10_2: C10.2 C11.1 R4.2 R5.1 R7.2 R8.1 R9.2 R10.1 R11.2 R13.1 R14.2 R15.1 | length 25.9
  Top Layer w0.5: R15.1 R13.1 R10.1 R8.1 R5.1 21.375,23.5 C11.1 C10.2@22.875,23.675 ; R4.2 22.875,11.925 C10.2@22.875,23.675 ; C10.2 C10.2@22.875,23.675
NetC11_2: C11.2 R3.2 R5.2 R8.2 R10.2 R13.2 R15.2 | length 17.4
  Top Layer w0.5: R15.2 18.175,13.9 R13.2 R10.2 R8.2 R5.2 18.175,23.5 C11.2
  Top Layer w1: R3.2 R13.2@18.175,13.9
NetC12_2: C12.2 C13.2 D2.1 R12.2 | length 73.6
  Top Layer w0.5: R12.2@2,35.975 v1(2.65,35.975)
  Top Layer w1: C13.2 59.543,18.993 60.743,20.193 C12.2 62,21.425 D2.1
  Mid-Layer 4 w0.5: v1(2.65,35.975) 2.65,40.686 6.614,44.65 12.919,44.65 22.175,35.394 22.175,25.15 28.925,18.4 47.057,18.4
NetC14_2: C14.2 IC1.14 R12.1 | length 4.1
  Top Layer w0.4: C14.2@4.025,37.775 IC1.14
  Top Layer w0.5: R12.1@4,35.975 C14.2@4,37.75
NetC15_1: C15.1 IC1.7 R16.1 | length 7
  Top Layer w0.4: R16.1 5.5,59.176 C15.1 5.95,56.3 5.95,56.005 7.025,54.93 IC1.7
NetC16_1: C16.1 R18.2 R19.2
NetC16_2: C16.2 Q1.2 Q2.2 R16.2 T1.11 | length 21.2
  Top Layer w0.7: R16.2 v1(3.525,60.438)
  Mid-Layer 2 w0.7: v1(3.525,60.438) 18.933,60.438 v1@22.134,57.237
  other v1: 49.209,53.902 49.934,53.902 50.659,53.902 51.34,53.902 31.459,54.152 32.184,54.152 32.909,54.152 33.59,54.152 49.209,54.602 49.934,54.602 50.659,54.602 51.331,54.602 54.403,54.802 55.128,54.802 43.909,54.827 44.634,54.827 45.359,54.827 46.04,54.827 31.459,54.852 32.184,54.852 32.909,54.852 33.581,54.852 20.813,55.319 21.513,55.319 28.575,55.323 49.209,55.303 49.934,55.303 50.659,55.303 51.331,55.303 22.234,55.342 22.934,55.342 23.635,55.342 24.342,55.342 25.059,55.342 25.784,55.342 26.509,55.342 27.886,55.335 27.19,55.35 43.909,55.527 44.634,55.527 45.359,55.527 46.031,55.527 54.403,55.502 55.128,55.502 31.459,55.553 32.184,55.553 32.909,55.553 33.581,55.553 20.813,55.988 21.513,55.988 22.234,56.011 22.934,56.011 23.635,56.011 24.342,56.011 25.059,56.011 25.784,56.011 26.509,56.011 27.19,56.011 27.896,56.011 28.596,56.011 49.209,56.017 49.934,56.017 50.659,56.017 51.331,56.011 54.403,56.203 55.128,56.203 43.909,56.228 44.634,56.228 45.359,56.228 46.031,56.228 33.581,56.261 31.459,56.267 32.184,56.267 32.909,56.267 20.813,56.688 21.513,56.688 22.234,56.711 22.934,56.711 23.635,56.711 24.342,56.711 25.059,56.711 25.784,56.711 26.509,56.711 27.208,56.711 27.914,56.711 28.614,56.711 49.209,56.717 49.934,56.717 50.659,56.717 51.331,56.735 42.525,56.9 43.207,56.9 54.403,56.917 55.128,56.917 43.909,56.942 44.634,56.942 45.359,56.942 46.031,56.936 46.733,56.942 31.459,56.967 32.184,56.967 32.909,56.967 37.425,56.966 38.15,56.966 33.581,56.985 35.978,56.995 36.703,56.995 20.813,57.388 21.513,57.388 29.328,57.395 22.234,57.411 22.934,57.411 23.635,57.411 24.342,57.411 25.059,57.411 25.784,57.411 26.509,57.411 27.208,57.411 27.914,57.411 28.614,57.411 49.209,57.417 49.934,57.417 50.659,57.417 51.34,57.425 42.525,57.6 43.198,57.6 54.403,57.617 55.128,57.617 43.909,57.642 44.634,57.642 45.359,57.642 46.031,57.66 46.726,57.648 47.425,57.637 31.459,57.667 32.184,57.667 32.909,57.667 33.59,57.675 37.425,57.666 38.15,57.666 35.978,57.695 36.703,57.695 20.813,58.088 21.513,58.088 22.234,58.111 22.934,58.111 23.635,58.111 24.342,58.111 25.059,58.111 25.784,58.111 26.509,58.111 27.208,58.111 27.914,58.111 28.614,58.111 29.328,58.095 42.525,58.301 43.198,58.301 54.403,58.317 55.128,58.317 43.909,58.342 44.634,58.342 45.359,58.342 46.736,58.335 47.425,58.323 37.425,58.367 38.15,58.367 38.875,58.367 39.547,58.367 46.04,58.35 35.978,58.395 36.703,58.395 29.328,58.801 23.635,58.817 24.342,58.817 25.059,58.817 25.784,58.817 26.509,58.817 27.208,58.817 27.914,58.817 28.614,58.817 42.525,59.015 43.198,59.008 43.909,59.027 44.634,59.027 45.359,59.027 46.04,59.027 46.74,59.027 47.45,59.027 54.403,59.027 55.128,59.027 35.978,59.08 36.703,59.08 37.425,59.081 38.15,59.081 38.875,59.081 39.547,59.074 26.509,59.519 27.208,59.519 27.901,59.519 28.614,59.522 29.339,59.522 42.525,59.715 43.198,59.732 43.909,59.727 44.634,59.727 45.359,59.727 46.031,59.727 46.733,59.727 47.446,59.727 54.403,59.727 55.128,59.727 35.978,59.78 36.703,59.78 37.425,59.781 38.15,59.781 38.875,59.781 39.547,59.798 27.176,60.219 27.901,60.219 28.614,60.222 29.339,60.222 42.525,60.415 43.207,60.422 43.909,60.428 44.634,60.428 45.359,60.428 46.031,60.428 54.403,60.428 55.128,60.428 46.733,60.43 47.446,60.43 35.978,60.481 36.703,60.481 37.425,60.481 38.15,60.481 38.875,60.481 39.556,60.488 27.176,60.922 27.901,60.919 28.614,60.922 29.339,60.922 46.031,61.136 47.45,61.136 45.359,61.142 46.733,61.142 54.403,61.142 55.128,61.142 37.409,61.183 38.109,61.173 35.978,61.195 36.703,61.195 27.886,61.62 28.596,61.62 29.339,61.62 46.726,61.848 47.425,61.837 54.403,61.842 55.128,61.842 46.031,61.86 35.978,61.895 36.703,61.895 37.409,61.883 28.596,62.32 29.339,62.32 46.736,62.535 47.425,62.523 54.403,62.542 55.128,62.542 35.978,62.595 36.703,62.595 73.134,63.777 73.859,63.777 74.584,63.777 75.265,63.777 75.965,63.777 76.675,63.777 72.417,64.477 73.134,64.477 73.859,64.477 74.584,64.477 75.256,64.477 75.958,64.477 76.671,64.477 71.71,65.178 72.417,65.178 73.134,65.178 73.859,65.178 74.584,65.178 75.256,65.178 75.958,65.18 76.671,65.18 75.256,65.886 76.675,65.886 71.009,65.892 71.71,65.892 72.417,65.892 73.134,65.892 73.859,65.892 74.584,65.892 75.958,65.892 70.309,66.592 71.009,66.592 71.71,66.592 72.417,66.592 73.134,66.592 73.859,66.592 74.584,66.592 75.951,66.598 76.65,66.587 75.256,66.61 75.961,67.285 76.65,67.273 70.309,67.292 71.009,67.292 71.71,67.292 72.417,67.292 73.134,67.292 73.859,67.292 74.584,67.292 75.265,67.3 70.309,67.961 71.009,67.961 71.71,67.961 72.417,67.961 73.134,67.961 73.859,67.961 74.584,67.961 75.265,67.961 75.971,67.961 76.671,67.961 70.309,68.661 71.009,68.661 71.71,68.661 72.417,68.661 73.134,68.661 73.859,68.661 74.584,68.661 75.283,68.661 75.989,68.661 76.689,68.661 70.309,69.361 71.009,69.361 71.71,69.361 72.417,69.361 73.134,69.361 73.859,69.361 74.584,69.361 75.283,69.361 75.989,69.361 76.689,69.361 70.309,70.061 71.009,70.061 71.71,70.061 72.417,70.061 73.134,70.061 73.859,70.061 74.584,70.061 75.283,70.061 75.989,70.061 76.689,70.061 70.309,70.767 71.009,70.767 71.71,70.767 72.417,70.767 73.134,70.767 73.859,70.767 74.584,70.767 75.283,70.767 75.989,70.767 76.689,70.767 70.309,71.467 71.009,71.467 71.71,71.467 72.417,71.467 73.134,71.467 73.859,71.467 74.584,71.467 70.309,72.167 71.009,72.167 71.71,72.167 72.417,72.167 73.134,72.167 73.859,72.167 74.584,72.167 70.309,72.867 71.009,72.867 71.71,72.867 72.417,72.867 73.134,72.867 73.859,72.867 74.584,72.867 71.006,73.578 71.71,73.578 72.431,73.578 73.134,73.587 73.859,73.587 74.584,73.587
NetC17_1: C17.1 D5.2 IC1.4 | length 11.7
  Top Layer w0.4: D5.2@7.65,63.047 7.65,61.1 10.265,58.485 C17.1 10.075,56.985 10.075,55.675 9.275,54.875 IC1.4
NetC18_2: C18.2 C19.1 C21.1 C22.2 C23.1 D6.2 IC1.6 P1.1 R1.2 R22.2 T1.7 | length 118.2
  Top Layer w0.4: IC1.6 7.775,59.35 5.95,61.175 5.95,63.675 7.275,65 7.3,65 8.1,65.8 D6.2
  Top Layer w0.5: R1.2 v4(20.825,72.15)
  Top Layer w0.7: D6.2 8.7,66.55 v1(9.375,66.55) C22.2 R22.2 ; C19.1 52.395,73.375 52.845,72.925 52.975,72.925 54.625,71.275 C18.2 58.15,71.225 59.2,71.225 61.175,69.25 C23.1 61.175,65.26 61.625,64.81 62.615,64.81 64.2,63.225 64.2,56 63.5,55.3 T1.7
  Mid-Layer 4 w0.5: v1(9.375,66.55) 44.375,66.55 v2(51.225,73.4)
  Bottom Layer w0.5: v4(20.825,72.15) 24.45,75.775 33.325,75.775 35.54,73.56 35.54,70.923 35.638,70.825 P1.1@35.7,70.825
  other v1: 59.276,54.602 59.986,54.602 59.27,55.302 59.983,55.302 59.27,56.005 59.983,56.005 62.326,64.777 63.036,64.777 62.32,65.477 63.033,65.477 62.32,66.18 63.033,66.18 41.676,72.877 42.386,72.877 44.701,72.887 45.411,72.887 41.67,73.577 42.383,73.577 44.695,73.587 45.408,73.587 53.561,73.905 54.271,73.905 41.67,74.28 42.383,74.28 44.695,74.29 45.408,74.29 53.554,74.605 54.267,74.605 53.554,75.307 54.267,75.307
NetC20_1: C20.1 IC1.3 R20.1 R21.1 R22.1 | length 14
  Top Layer w0.4: IC1.3 10.025,54.695 11.73,56.4 11.73,59.45 R20.1@11.73,61.105 ; R21.1@10.225,61.2 R21.1 R20.1@11.635,61.2 ; R20.1 11.825,64.35 12.025,64.55 R22.1
NetC22_1: C22.1 R21.2 | length 1.4
  Top Layer w0.5: R21.2 C22.1
NetC24_1: C24.1 D7.2 IC1.1 P1.2 R24.1 R25.1 | length 38
  Top Layer w0.4: IC1.1 11.53,52.84 11.53,54.03 12.106,54.606 15.186,54.606 16.875,56.295 16.875,56.6 C24.1
  Top Layer w0.5: D7.2@19.9,74.025 28.425,74.025 30.475,71.975 30.475,70.625 P1.2@30.55,70.55
  Top Layer w0.7: C24.1 v2(17.075,62.644) ; R24.1 23.195,69.775 24.073,69.775 24.123,69.725 v2(24.15,69.725)
  Mid-Layer 1 w0.7: v2@17.079,62.675 17.1,62.675 v2(24.15,69.725)
NetD1_1: D1.1 R6.1 | length 2.8
  Top Layer w1: R6.1 D1.1
NetD1_2: D1.2 D3.1 | length 2.6
  Top Layer w1.5: D1.2 D3.1
NetD2_2: D2.2 T1.5 | length 13.4
  Top Layer w1: T1.5 52.829,25.229 54.95,27.35 61.7,27.35 63.833,25.217 D2.2
NetD3_2: D3.2 IC1.24 T1.2 | length 28.1
  Top Layer w0.6: D3.2 16.009,36.05 22.884,29.175 33.12,29.175 34.67,27.625 34.67,25.115 T1.2@34.735,25.05
NetD4_1: D4.1 IC1.5 R17.1 | length 22.9
  Top Layer w0.4: IC1.5 v1(8.525,55.75)
  Top Layer w0.5: v1(21.925,60.95) 23.582,60.95 23.582,61.018 23.682,61.118 24.289,61.118 25.432,62.261 25.432,62.265 R17.1@25.652,62.486
  Mid-Layer 4 w0.5: v1(8.525,55.75) 13.725,60.95 v1(21.925,60.95)
NetD4_2: D4.2 Q1.1 Q2.1 R17.2 | length 29.4
  Top Layer w0.5: D4.2@23.525,64.299 v2(28.705,64.299) Q2.1 ; Q1.1 48.99,65.564 v2(49.025,65.599)
  Mid-Layer 4 w0.5: v2(28.705,64.299) 47.699,64.299 48.999,65.599 v2(49.025,65.599)
NetD5_1: D5.1 D6.1 | length 3
  Top Layer w0.5: D5.1@4.275,63.025 4.275,65.95 D6.1@4.3,65.975
NetD7_1: D7.1 R1.1 | length 1.9
  Top Layer w0.7: R1.1 17.75,74.025 D7.1
NetJ1_1: J1.1 L1.1 | length 31.3
  Top Layer w1: J1.1@28,4.675 28.175,4.675 28.65,5.15 32.05,8.55 43.825,8.55 49.539,2.836 L1.1@55.373,2.836
NetJ1_3: J1.3 L1.3 | length 28.8
  Top Layer w1: L1.3@62.5,10.35 62.5,10.576 L1.3@62.539,10.614
  Bottom Layer w1: J1.3 38.1,4.5 40.075,6.475 59.088,6.475 63.293,10.679 v3(63.293,11.321)
  other v3: 64,10.65
NetR3_1: R3.1 R6.2 | length 1.7
  Top Layer w1: R3.1 R6.2
pads on no net: IC1.8 IC1.9 IC1.10 IC1.11 IC1.12 IC1.15 J1.2 L1.0 T1.3 T1.4 T1.8 T1.9 T1.10 T1.12
copper on no net:
  other v1: 38.875,56.966 39.556,56.966 38.875,57.666 39.547,57.666

## Polygon pours and split planes (outlines as drawn)
GND_1 on Top Layer "GND_1_L01_P059" (solid, pour order 59): 61.975,58.05 56.125,58.05 56.125,63.515 52.495,63.515 49.955,63.515 49.955,65.645 49.341,66.259 48.634,66.259 46.837,64.462 38.4,64.462 37.602,63.664 31.56,63.664 31.56,65.004 31.114,65.45 14.875,65.45 14.875,67.975 37.825,67.975 40.407,70.557 53.143,70.557 54.025,69.675 58.75,69.675 59.575,68.85 59.575,63.825 61.154,62.246 61.975,62.246
NetC16_2 on Top Layer "NETC16_2_L01_P056" (solid, pour order 56): 20.225,59.45 25.175,59.45 28.696,62.971 36.804,62.971 38.925,60.85 44.125,60.85 46.171,62.896 55.475,62.896 55.475,52.975 20.225,52.975
NetC24_1 on Top Layer "NETC24_1_L01_P060" (solid, pour order 60): 31.66,68.802 22.029,68.802 22.029,72.312 31.66,72.312
NetC18_2 on Top Layer "NETC18_2_L01_P058" (solid, pour order 58): 34.34,70.08 34.338,70.078 34.338,68.8 37.3,68.8 40.425,71.925 53.27,71.925 54.545,70.65 58.775,70.65 60.375,69.05 60.375,64.125 61.35,63.15 62.045,63.15 62.5,62.695 62.5,57.825 62.292,57.617 56.125,57.617 56.125,52.975 64.55,52.975 65.65,54.075 65.65,67 56.075,76.575 51.645,76.575 39.24,76.575 34.34,71.675
GND on Top Layer "NONET_L-01_P-001" (solid, pour order 51): 8.13,40.873 8.13,10.32 9.352,9.098 9.352,3.475 7.5,3.475 0.375,10.6 0.375,40.915 3.48,40.915 3.48,39.1 3.05,39.1 2.5,38.55 2.5,37.1 1.525,37.1 1.425,37 1.425,34.925 4.975,34.925 5.32,35.27 5.32,40.915
NetC16_1 on Top Layer "NETC16_1_L01_P057" (solid, pour order 57): 44.375,62.246 44.375,63.575 38.354,63.575 38.354,62.246
GND on Top Layer "GND_L01_P054" (solid, pour order 54): 60.425,22.113 60.425,24.285 58.346,26.364 57.475,26.367 53.258,22.15 43.75,22.15 42.925,21.325 42.925,19.525 43.35,19.1 57.411,19.1
NetC1_1 on Top Layer "NONET_L-01_P-001" (solid, pour order 4): 31.975,26.8 27.775,26.8 25.525,24.55 25.525,22.093 25.675,21.943 25.675,11.025 22.85,8.2 20.95,8.2 20.977,8.173 20.977,3.7 22.85,3.7 30.875,11.725 44.7,11.725 46.659,13.684 44.161,16.182 32.368,16.182 31.35,17.2 31.35,22.698 31.952,23.3
NetD3_2 on Top Layer "NONET_L-01_P-001" (solid, pour order 1): 11.55,35.05 11.55,39.085 11.32,39.315 11.32,40.915 12.06,40.915 14.944,40.915 24.883,30.975 33,30.975 36.225,27.75 36.225,23.368 33.735,23.366 33.735,27.815 32.85,28.7 20.724,28.7 14.374,35.05
NetJ1_3 on Top Layer "NONET_L-01_P-001" (solid, pour order 53): 61.135,9.882 63.444,12.191 64.859,10.777 62.549,8.468
GND_1 on Top Layer "NONET_L-01_P-001" (solid, pour order 43): 2.36,54.01 0.425,54.01 0.425,70.1 15.5,70.1 15.5,56.115 12.625,56.115 12.465,56.275 12.465,58.075 12.646,58.075 13.425,58.854 13.425,67.55 12.975,68 2.925,68 2.36,67.435 2.36,58.715 3.276,57.799 3.276,54.926
no net on Top Solder "NONET_L-01_P-001" (solid): 63,38.25 63,28 65.4,28 65.4,38.25
GND on Mid-Layer 4 "NONET_L-01_P-001" (solid, pour order 7): 8.13,40.915 8.13,10.32 9.352,9.098 9.352,3.475 7.5,3.475 0.375,10.6 0.375,40.915 3.48,40.915 5.32,40.915
no net on Bottom Solder "NONET_L-01_P-001" (solid): 63,38.25 63,28 65.4,28 65.4,38.25
NetJ1_3 on Bottom Layer "NONET_L-01_P-001" (solid, pour order 52): 61.135,9.882 63.441,12.188 64.855,10.774 62.549,8.468
GND_1 on Bottom Layer "NONET_L-01_P-001" (solid, pour order 47): 2.363,54.032 0.428,54.032 0.428,70.122 15.728,70.122 15.728,54.032
GND on Bottom Layer "NONET_L-01_P-001" (solid, pour order 5): 57.775,22.15 57.775,19.468 48.016,9.709 28.284,9.709 22.05,3.475 7.5,3.475 7.5,3.5 0.375,10.6 0.375,40.912 8.13,40.912 8.13,10.32 9.175,9.275 10.425,9.275 20.775,19.625 38.947,19.625 41.472,22.15
GND_1 on Mid-Layer 2 "NONET_L-01_P-001" (solid, pour order 3): 2.36,54.01 0.425,54.01 0.425,70.1 15.725,70.1 15.725,54.01
GND on Mid-Layer 2 "NONET_L-01_P-001" (solid, pour order 2): 8.13,40.915 8.13,10.32 9.352,9.098 9.352,3.475 7.5,3.475 0.375,10.6 0.375,40.915 3.48,40.915 5.32,40.915
GND on Mid-Layer 3 "NONET_L-01_P-001" (solid, pour order 6): 8.13,40.915 8.13,10.32 9.352,9.098 9.352,3.475 7.5,3.475 0.375,10.6 0.375,40.915 3.48,40.915 5.32,40.915
GND_1 on Mid-Layer 3 "NONET_L-01_P-001" (solid, pour order 44): 2.363,54.032 0.428,54.032 0.428,70.122 15.728,70.122 15.728,54.032
GND on Mid-Layer 1 "NONET_L-01_P-001" (solid, pour order 8): 8.13,40.915 8.13,10.32 9.352,9.098 9.352,3.475 7.5,3.475 0.375,10.6 0.375,40.915 3.48,40.915 5.32,40.915

## Keep-outs
Keep-Out Layer:
  circle w0.254: c63,74 r1.5
  circle w0.254: c3,74 r1.5
  circle w0.254: c3,3 r1.5
  circle w0.254: c63,3 r1.5
  lines w0.254: 3,77 63,77 ; 3,77 ccw(c3,74) 0,74 0,3 ccw(c3,3) 3,0 63,0 ccw(c63,3) 66,3 66,74 ccw(c63,74) 63,77 ; 8.95,10.675 ccw(c9.7,10.675) 10.45,10.675 10.45,41.763 ccw(c9.7,41.763) 8.95,41.763 8.95,10.678 ; 26.664,26.996 cw(c26.664,27.746) 26.664,28.496 ; 26.664,27 32.057,27 32.1,26.957 32.1,21.71 32.1,21.139 ccw(c32.85,21.139) 33.6,21.139 33.6,27.74 32.84,28.5 26.664,28.5

## Other copper
Top Layer:
  rectangle net NetC11_2: 16.5,11 18.675,24.575
  rectangle net NetC10_2: 20.977,11 23.27,24.575
  text "1" at 64.946,28.629 h1.52 r90
Mid-Layer 2:
  text "3" at 64.946,31.679 h1.52 r90
Mid-Layer 3:
  text "4" at 64.946,33.329 h1.52 r90
Mid-Layer 1:
  text "2" at 64.946,29.954 h1.52 r90
Mid-Layer 4:
  text "5" at 64.946,35.104 h1.52 r90
Bottom Layer:
  text "6" at 64.946,36.729 h1.52 r90

## Silkscreen, mask and mechanical layers (free items; w line width, h text height)
Top Overlay:
  circle w1: c63,74 r2
  circle w1: c63,3 r2
  circle w1: c3,3 r2
  circle w1: c3,74 r2
  text "GND" at 24.802,75.479 h1
  text "VCC" at 39.085,74.285 h1 r45
  text "HV_GND" at 42.054,1.021 h1
  text "HV_VCC" at 18.604,0.871 h1
Bottom Overlay:
  circle w1: c63,3 r2
  circle w1: c3,3 r2
  circle w1: c3,74 r2
  circle w1: c63,74 r2